# Altium PCB PCB1.PcbDoc (part 1 of 2)
Units mm, origin at the board's own origin, x right, y up, seen from the top; angles counter-clockwise.
Board outline 135 x 104.39 mm, 2 copper layers (Top Layer, Bottom Layer); 68 components, 47 nets, 230 pads, 90 vias.
Unrouted connection lines stored in the file: 3.
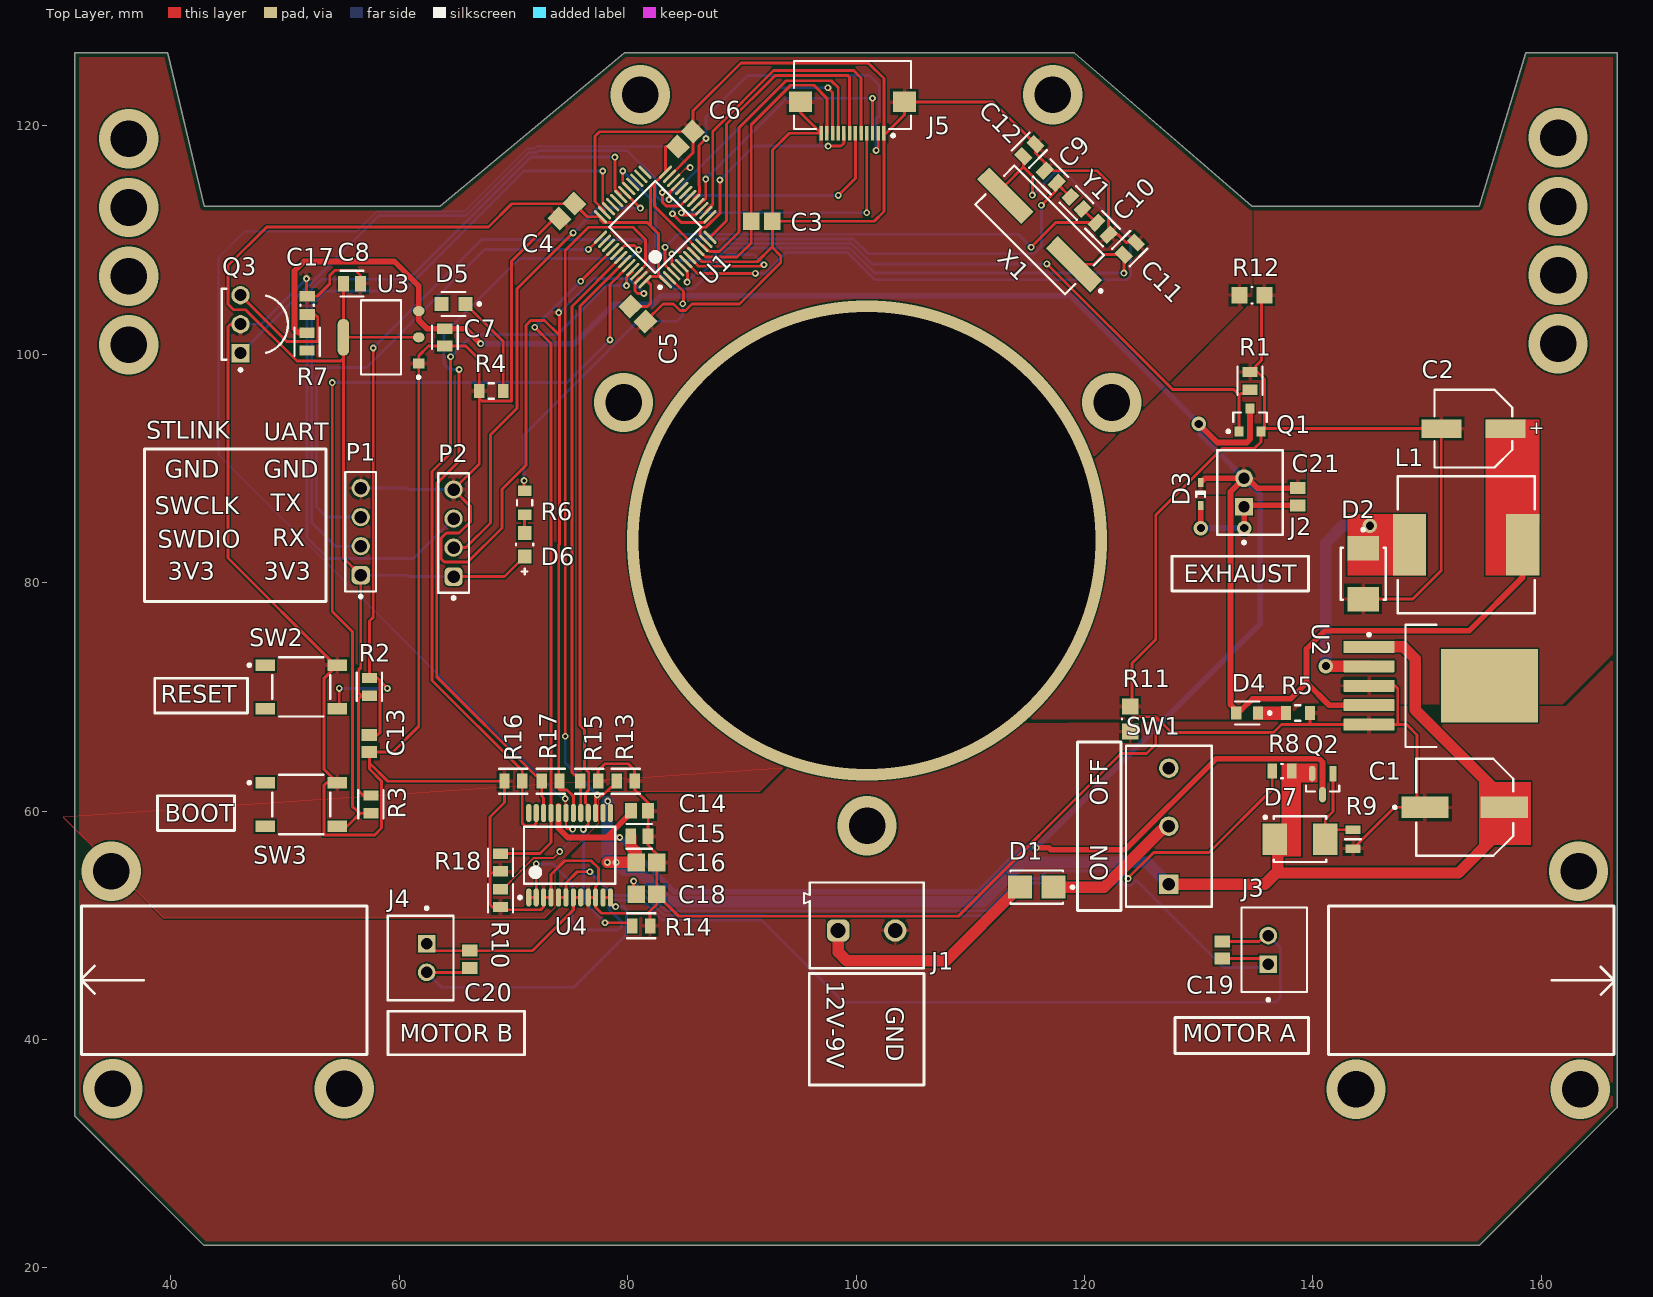
[diagram p0: Top Layer view]
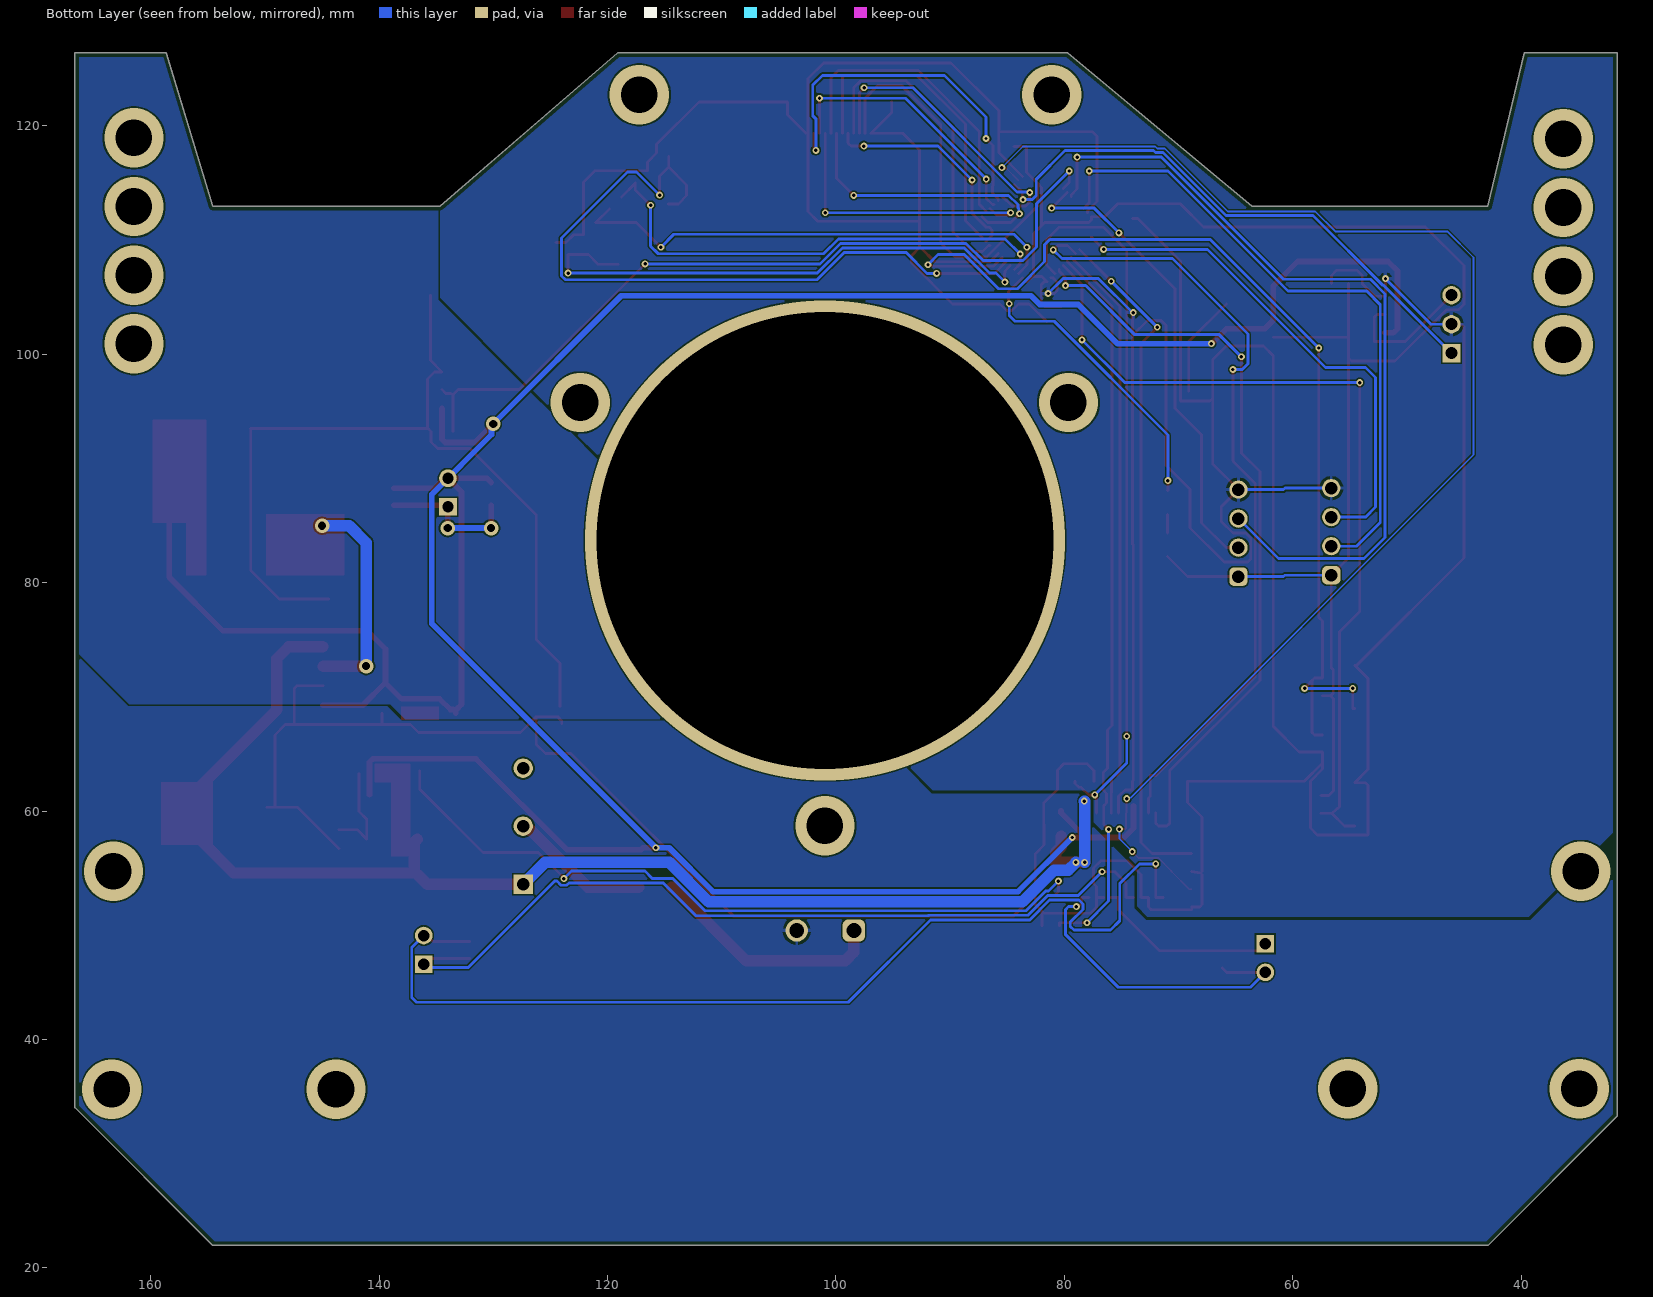
[diagram p1: Bottom Layer view, seen from below]
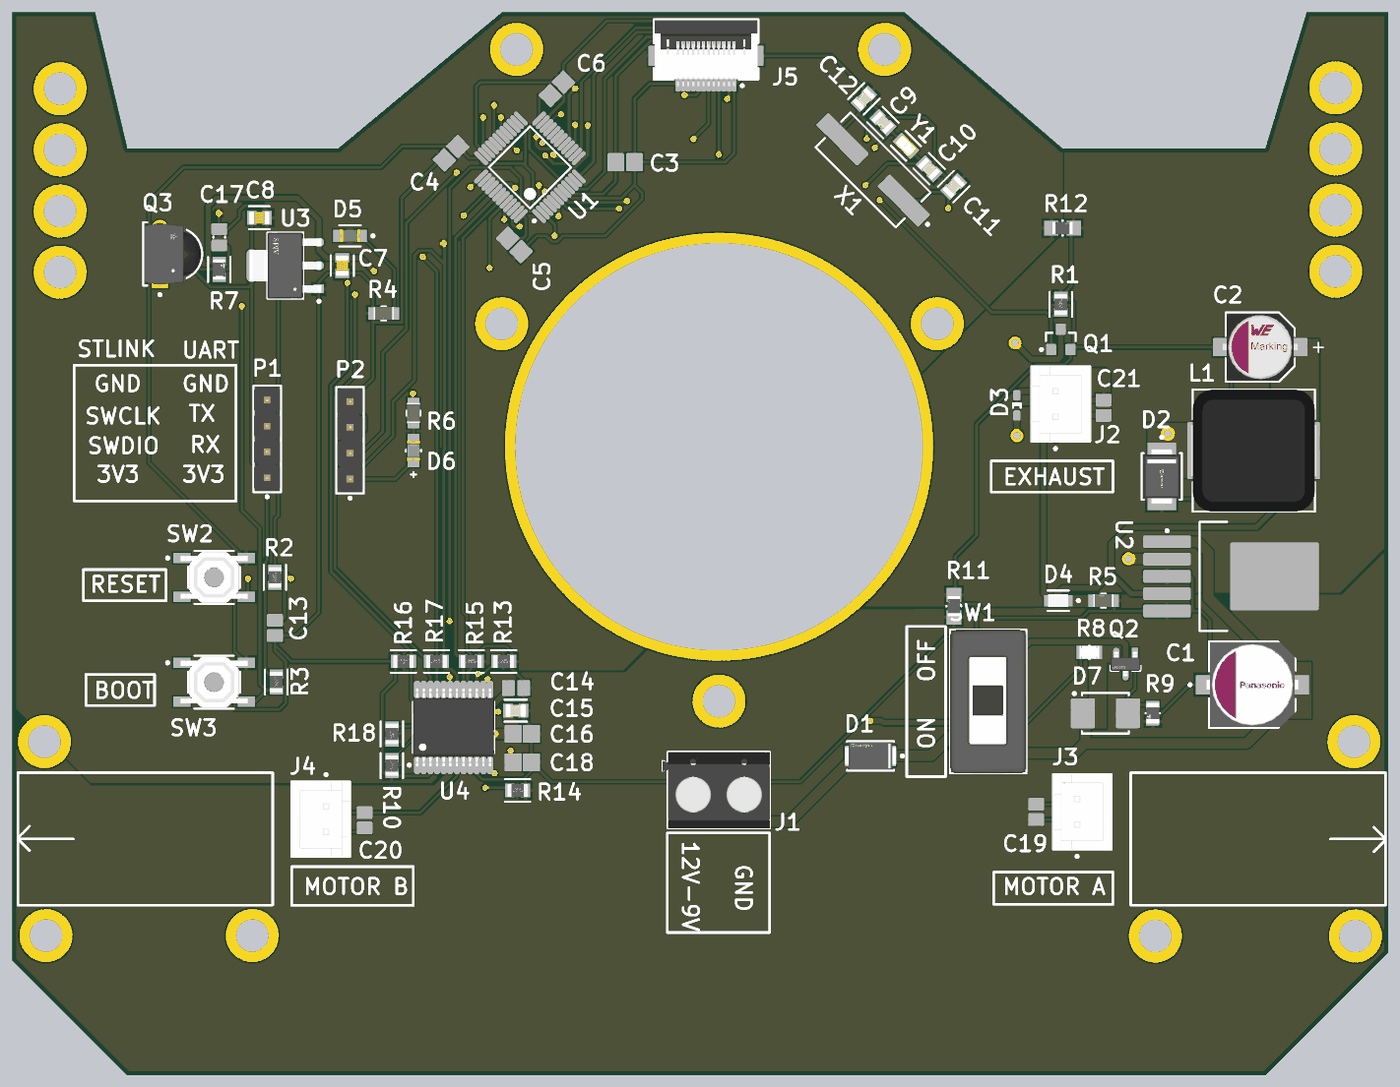
[diagram p3: 3D render of the assembled board from above, using the file's embedded part models]

## Layer stack, top to bottom
Top Solder: solder mask 0.0102, Solder Resist, Dk 3.5
Top Layer: signal copper 0.0356
Dielectric 1: dielectric 0.32, FR-4, Dk 4.8
Bottom Layer: signal copper 0.0356
Bottom Solder: solder mask 0.0102, Solder Resist, Dk 3.5

## Board outline
63.585,112.945 42.926,112.945 39.751,126.365 31.623,126.365 31.623,33.274 42.926,21.971 154.559,21.971 166.624,34.036 166.624,126.365 158.623,126.365 154.559,112.945 134.675,112.945 119.126,126.365 79.713,126.365

## Design rules (kind name [scope] priority, off if disabled: settings)
AssemblyTestPointUsage [All] p1: isadvanced=TRUE
AssemblyTestpoint [All] p1: isadvanced=TRUE testpointundercomponent=TRUE minsize=1.016 maxsize=2.54 preferedsize=1.524 minholesize=0 maxholesize=1.016 preferedholesize=0.813 testpointgrid=0.025 usegrid=TRUE gridtolerance=0 allowsidetop=TRUE allowsidebottom=TRUE
BoardOutlineClearance BoardOutlineClearance_1 [All] p1: isadvanced=TRUE gap=0.38 ignorepadtopadclearanceinfootprint=FALSE
Clearance Clearance_1 [OnMid vs OnMid] p1: gap=0.15 ignorepadtopadclearanceinfootprint=FALSE sourcerule=47 cellrowname=All cellrowtype=0 cellcolname=All cellcoltype=0 innerlayers=TRUE
Clearance Clearance_2 [(ExistsOnLayer('Top Layer') Or ExistsOnLayer('Bottom Layer')) vs (ExistsOnLayer('Top Layer') Or ExistsOnLayer('Bottom Layer'))] p2: gap=0.15 ignorepadtopadclearanceinfootprint=FALSE sourcerule=47 cellrowname=All cellrowtype=0 cellcolname=All cellcoltype=0 outerlayers=TRUE
Clearance [All] p3: gap=0.254 ignorepadtopadclearanceinfootprint=FALSE ismatrix=TRUE
ComponentClearance [All] p1: isadvanced=TRUE gap=0.254 collisioncheckmode=3 verticalgap=0.254 showdistances=FALSE
DiffPairsRouting [All] p1: maxlimit=1 minlimit=1 mostfreqgap=1 toplayer_minwidth=0.381 toplayer_maxwidth=0.381 toplayer_prefwidth=0.381 bottomlayer_minwidth=0.381 bottomlayer_maxwidth=0.381 bottomlayer_prefwidth=0.381 maxuncoupledlength=12.7
FabricationTestPointUsage [All] p1: isadvanced=TRUE valid=0 allowmultiple=FALSE
FabricationTestpoint [All] p1: isadvanced=TRUE side=3 testpointundercomponent=TRUE minsize=1.016 maxsize=2.54 preferedsize=1.524 minholesize=0 maxholesize=1.016 preferedholesize=0.813 testpointgrid=0.025 allowsidetop=TRUE allowsidebottom=TRUE usegrid=TRUE gridtolerance=0
FanoutControl Fanout_BGA [IsBGA] p1: isadvanced=TRUE bgadir=Out bgaviamode=Centered fanoutstyle=Auto fanoutdirection=Alternating viagrid=0.025 // Fanout_BGA (Default Rule)
FanoutControl Fanout_LCC [IsLCC] p2: isadvanced=TRUE bgadir=Out bgaviamode=Centered fanoutstyle=Auto fanoutdirection=Alternating viagrid=0.025 // Fanout_LCC (Default Rule)
FanoutControl Fanout_SOIC [IsSOIC] p3: isadvanced=TRUE bgadir=Out bgaviamode=Centered fanoutstyle=Auto fanoutdirection=Alternating viagrid=0.025 // Fanout_SOIC (Default Rule)
FanoutControl Fanout_Small [(CompPinCount < 5)] p4: isadvanced=TRUE bgadir=Out bgaviamode=Centered fanoutstyle=Auto fanoutdirection=OutThenIn viagrid=0.025 // Fanout_Small (Default Rule)
FanoutControl Fanout_Default [All] p5: isadvanced=TRUE bgadir=Out bgaviamode=Centered fanoutstyle=Auto fanoutdirection=Alternating viagrid=0.025 // Fanout_Default (Default Rule)
Height [All] p1: isadvanced=TRUE minheight=0 maxheight=25.4 prefheight=12.7
HoleSize [All] p1: isadvanced=TRUE absolutevalues=TRUE maxlimit=2.54 minlimit=0.025 maxpercent=80.000 minpercent=20.000
HoleToHoleClearance [All] p1: isadvanced=TRUE gap=0.254 allowstackedmicrovias=TRUE
LayerPairs [All] p1: isadvanced=TRUE enforce=TRUE
MinimumSolderMaskSliver [All] p1: isadvanced=TRUE minsoldermaskwidth=0.254
NetAntennae [All] p1: isadvanced=TRUE netantennaetolerance=0
PasteMaskExpansion [All] p1: isadvanced=TRUE expansion=0.1
PlaneClearance [All] p1: isadvanced=TRUE clearance=0.508
PlaneConnect [All] p1: isadvanced=TRUE planeconnectstyle=Relief reliefexpansion=0.508 reliefentries=4 reliefconductorwidth=0.254 reliefairgap=0.254
PolygonConnect [All] p1: connectstyle=Relief reliefconductorwidth=0.3 reliefentries=4 polygonreliefangle="90 Angle" airgapwidth=0.254
RoutingCorners [All] p1: isadvanced=TRUE cornerstyle=45-Degree minsetback=2.54 maxsetback=2.54
RoutingPriority [All] p1: isadvanced=TRUE routingpriority=0
RoutingVias [All] p1: holewidth=0.3 width=0.6 viastyle="Through Hole" minholewidth=0.3 minwidth=0.6 maxholewidth=0.5 maxwidth=1
ShortCircuit [All] p1: isadvanced=TRUE allowed=FALSE
SilkToSilkClearance [All] p1: isadvanced=TRUE silktosilkclearance=0.254
SilkToSolderMaskClearance [IsPad] p1: isadvanced=TRUE minsilkscreentomaskgap=0.15 clearancetoexposedcopper=TRUE
SolderMaskExpansion [All] p1: isadvanced=TRUE expansion=0.05 istentingtop=FALSE
SupplyNets "Schematic Supply Nets_3" [InNet('12V-9V')] p1: isadvanced=TRUE voltage=0.000
SupplyNets "Schematic Supply Nets_2" [InNet('out_fb')] p2: isadvanced=TRUE voltage=0.000
SupplyNets "Schematic Supply Nets_1" [InNet('+3V3')] p3: isadvanced=TRUE voltage=0.000
SupplyNets "Schematic Supply Nets" [InNet('GND')] p4: isadvanced=TRUE voltage=0.000
UnRoutedNet [All] p1: isadvanced=TRUE
UnpouredPolygon [All] p1: isadvanced=TRUE
Width MaxMinWidth_2 [InNet('12V-9V')] p1: maxlimit=1.25 minlimit=0.15 preferedwidth=1 minimp=50.000000 maximp=50.000000 favimp=50.000000
Width MaxMinWidth_3 [InNet('IR-INT')] p2: maxlimit=1 minlimit=0.15 preferedwidth=0.5 minimp=50.000000 maximp=50.000000 favimp=50.000000
Width MaxMinWidth_4 [InNet('STBY')] p3: maxlimit=1.25 minlimit=0.15 preferedwidth=1 minimp=50.000000 maximp=50.000000 favimp=50.000000
Width MaxMinWidth_5 [InNet('out_fb')] p4: maxlimit=1 minlimit=0.15 preferedwidth=0.5 minimp=50.000000 maximp=50.000000 favimp=50.000000
Width MaxMinWidth_6 [InNet('SW_12V-9V')] p5: maxlimit=1.25 minlimit=0.15 preferedwidth=1 minimp=50.000000 maximp=50.000000 favimp=50.000000
Width MaxMinWidth_1 [InxNetClass('All xNets')] p6: maxlimit=1 minlimit=0.15 preferedwidth=0.25 minimp=50.000000 maximp=50.000000 favimp=50.000000
Width [All] p7: maxlimit=1 minlimit=0.15 preferedwidth=0.25 minimp=50.000000 maximp=50.000000 favimp=50.000000
3 further rules are at their usual default settings.

## Components (designator, comment, footprint, x,y, rotation, side; value= is the part's Value field where it differs from the comment)
C1 "680u" FP-OS-CON-SMT-E12-MFG 153.289,60.325 r0 top
C2 "220u" WCAP-ASLI_D6.3H7.7 154.051,93.472 r0 top
C3 "100n" CAPC2013X145X50ML20T20 91.757,111.636 r180 top
C4 "100n" CAPC2013X145X50ML20T20 74.683,112.512 r45 top
C5 "100n" CAPC2013X145X50ML20T20 80.899,103.505 r135 top
C6 "100n" CAPC2013X145X50ML20T20 85.06,118.817 r225 top
C7 "10u" FP-C0805C106K8RACAUTO-MFG 64.008,101.473 r90 top
C8 "10u" FP-C0805C106K8RACAUTO-MFG 55.88,106.172 r180 top
C9 "20p" FP-C0805C-DN-MFG 117.045,115.517 r135 top value="20 pF"
C10 "20p" FP-C0805C-DN-MFG 121.581,110.981 r315 top value="20 pF"
C11 "20p" FP-C0805C-DN-MFG 123.979,109.236 r45 top value="20 pF"
C12 "20p" FP-C0805C-DN-MFG 115.177,117.845 r45 top value="20 pF"
C13 "100n" CAPC2013X140X45LL15T25 57.404,65.913 r90 top
C14 "100n" CAPC2013X140X45LL15T25 81.059,60.014 r180 top
C15 "0.1u" FP-C0805C-DN-MFG 81.026,57.785 r0 top value="0.10 μF"
C16 "0.47u" CAPC2013X140X50ML20T25 81.661,55.499 r180 top
C17 "CAP 4.7uF 10V 0805(2012)" CAPC0805(2012)155_L 51.943,104.267 r270 top value=4.7uF
C18 "10u" CAPC2013X145X50ML20T25 81.661,52.705 r180 top
C19 "100n" CAPC2013X140X45LL15T25 132.065,47.843 r90 top
C20 "100n" CAPC2013X140X45LL15T25 66.196,47.023 r270 top
C21 "100n" CAPC2013X140X45LL15T25 138.684,87.515 r270 top
D1 "1N4007 SMD" FP-1N4007_SMD-IPC_C 115.824,53.34 r180 top
D2 "0V55 5A" FP-DO-214AA-MFG 144.399,80.772 r270 top
D3 "1N4148WT" FAIR-SOD-523F-2_V 130.175,87.757 r270 top
D4 "RED" FP-SML-LXT0805IW-TR-MFG 134.239,68.58 r180 top
D5 "GREEN" FP-LTST-C171GKT-MFG 64.77,104.394 r180 top
D6 "BLUE" FP-SM0805UBWC-MFG 70.993,83.312 r90 top
D7 "6.8V" ONSC-SMB-2-403A-03_H_V 138.862,57.531 r0 top
J1 "KRE" 691502710002 100.938,49.992 r0 top
J2 "EXHAUST" FP-B2B-XH-A_LF_SN-MFG 134.493,87.884 r90 top
J3 "MOTOR-A" FP-B2B-XH-A_LF_SN-MFG 136.613,47.85 r90 top
J4 "MOTOR-B" FP-B2B-XH-A_LF_SN-MFG 61.89,47.125 r270 top
J5 "687112149022" 687112149022 99.695,122.682 r180 top
L1 "33u" SUMI-CDRH127_V 153.416,83.312 r90 top
P1 "ST-LINK" 61300411121 56.642,84.455 r90 top
P2 "UART" 61300411121 64.77,84.328 r90 top
Q1 "2N7002LT1G" ONSC-SOT-23-3-318-08_V 134.493,94.234 r90 top
Q2 "DMP3099L-7" FP-SOT23-IPC_B 140.843,62.357 r270 top
Q3 "TSOP34836" FP-6_550-5169_01-4-MFG 47.371,102.616 r0 top
R1 "10k" FP-CRGCQ0805-IPC_C 134.493,97.663 r90 top value=10KΩ
R2 "10k" FP-CRGCQ0805-IPC_C 57.404,70.866 r90 top value=10KΩ
R3 "10k" FP-CRGCQ0805-IPC_C 57.531,60.579 r270 top value=10KΩ
R4 "220R" FP-AC0805-MFG 68.072,96.774 r0 top value=220Ω
R5 "220R" FP-AC0805-MFG 138.684,68.58 r180 top value=220Ω
R6 "220R" FP-AC0805-MFG 70.993,86.995 r270 top value=220Ω
R7 "100R" FP-CRCW0805-HPe3-IPC_C 51.943,101.092 r270 top
R8 "1R" FP-CRCW0805-e3-IPC_C 137.287,63.5 r180 top
R9 "100k" FP-MCU0805-IPC_C 143.51,57.531 r270 top
R10 "10k" FP-CRGCQ0805-IPC_C 68.876,52.38 r270 top value=10KΩ
R11 "JUMPER" FP-HCJ0805-MFG 124.005,68.043 r90 top
R12 "JUMPER" FP-HCJ0805-MFG 134.663,105.156 r0 top
R13 "10k" FP-CRGCQ0805-IPC_C 79.843,62.613 r0 top value=10KΩ
R14 "10k" FP-CRGCQ0805-IPC_C 81.202,49.951 r0 top value=10KΩ
R15 "10k" FP-CRGCQ0805-IPC_C 76.65,62.613 r0 top value=10KΩ
R16 "10k" FP-CRGCQ0805-IPC_C 70.009,62.613 r180 top value=10KΩ
R17 "10k" FP-CRGCQ0805-IPC_C 73.261,62.613 r0 top value=10KΩ
R18 "10k" FP-CRGCQ0805-IPC_C 68.876,55.496 r270 top value=10KΩ
SW1 "25436NAH6" FP-25436NAH6-MFG 127.381,58.674 r90 top
SW2 "8-1437565-1" FP-8-1437565-1-MFG 51.435,70.866 r0 top
SW3 "8-1437565-1" FP-8-1437565-1-MFG 51.435,60.579 r0 top
U1 "STM32F103C8T6" STM-LQFP48_L 82.423,111.125 r135 top
U2 "LM2596S-5.0/NOPB" KTT0005B_M 151.207,70.964 r0 top
U3 "AMS1117-3.3" FP-AMS1117-IPC_C 58.42,101.473 r180 top
U4 "TB6612FNG" TOSH-SSOP-24_M 74.93,56.134 r90 top
X1 "16MHz" CTS-ATS-SM-XTAL-2 116.078,110.871 r135 top
Y1 "32.768k" FP-NX2012SA-MFG 119.297,113.237 r135 top
? "Comment" "micro gear motor n20" 166.353,51.686 r180 top
? "Comment" "micro gear motor n20" 32.186,38.686 r0 top

## Footprints (in the part's own frame and the unit in brackets; to place one, negate y for a bottom-side part, rotate by r counter-clockwise, add the part's x,y. Pads: shape width x height; smd on the part's side, far side on the other; paste and mask are expansions set on the pad)
61300411121 [mm] "Pin Header, pitch 2.54 mm, THT, Vertical, single row, 4p"
  rrect50% 1.6x1.6 hole 1.1: 1(-3.81,0)
  round 1.6 hole 1.1: 2(-1.27,0) 3(1.27,0) 4(3.81,0)
  silkscreen extent -5.8,-1.34 5.23,1.34, body extent -5.08,-1.27 5.08,1.27, height 8.57
687112149022 [mm] "0.50mm SMT ZIF Horizontal Hinge Type Bottom Contact, 12p"
  rect 0.3x1.3 smd: 1(-2.75,3.35) 2(-2.25,3.35) 3(-1.75,3.35) 4(-1.25,3.35) 5(-0.75,3.35) 6(-0.25,3.35) 7(0.25,3.35) 8(0.75,3.35) 9(1.25,3.35) 10(1.75,3.35) 11(2.25,3.35) 12(2.75,3.35)
  rect 2x1.8 smd: M1(-4.55,0.6) M2(4.55,0.6)
  silkscreen extent -5.13,-2.98 5.13,3.67, body extent -5.05,-2.9 5.05,3.6, height 2.25
691502710002 [mm] "5,00mm - modular - Reflow compatible - Horizontal entry with pressure clamp - 02p"
  rrect50% 1.95x1.95 hole 1.3: 1(-2.5,-0.45)
  round 1.95 hole 1.3: 2(2.5,-0.45)
  silkscreen extent -5.5,-3.75 5,3.75, body extent -5.5,-3.75 5,3.75, height 10.1
CAPC0805(2012)155_L [mm] "Chip Capacitor, Body 2.0x1.2mm, Height 1.55mm, IPC High Density"
  rect 0.95x1.35 smd: 1(-0.8,0) 2(0.8,0)
  silkscreen extent -0.05,-0.58 0.05,0.58, body extent -1.1,-0.72 1.1,0.72, height 1.55
CAPC2013X140X45LL15T25 [mm] "Chip Capacitor, 2-Leads, Body 2.00x1.25mm, IPC High Density"
  rect 1.05x1.35 smd: 1(-0.75,0) 2(0.75,0)
  body extent -1.08,-0.7 1.07,0.7, height 1.4
CAPC2013X140X50ML20T25 [mm] "Chip Capacitor, 2-Leads, Body 2.00x1.25mm, IPC Low Density"
  rect 1.5x1.55 smd: 1(-0.9,0) 2(0.9,0)
  body extent -1.1,-0.72 1.1,0.72, height 1.4
CAPC2013X145X50ML20T20 [mm] "Chip Capacitor, 2-Leads, Body 2.00x1.25mm, IPC Low Density"
  rect 1.45x1.55 smd: 1(-0.925,0) 2(0.925,0)
  body extent -1.1,-0.72 1.1,0.72, height 1.45
CAPC2013X145X50ML20T25 [mm] "Chip Capacitor, 2-Leads, Body 2.00x1.25mm, IPC Low Density"
  rect 1.5x1.55 smd: 1(-0.9,0) 2(0.9,0)
  body extent -1.1,-0.72 1.1,0.72, height 1.45
CTS-ATS-SM-XTAL-2 [mm] "SMD, 2-Leads, Body 11.1x4.83mm, Pitch 8.5mm"
  rect 5.5x1.5 smd: 1(-4.25,0) 2(4.25,0)
  silkscreen extent -7.67,-2.42 5.55,2.42, body extent -5.59,-2.42 5.59,2.42, height 4.3
FAIR-SOD-523F-2_V [mm] "SMD, 2-Leads, Body 1.2x0.8mm, Height 0.7mm"
  rect 0.8x0.5 smd: 1(-1,0) 2(1,0)
  silkscreen extent -0.2,-0.38 0.24,0.38, body extent -0.6,-0.4 0.6,0.4, height 0.71
FP-1N4007_SMD-IPC_C [mm]
  rect 2.1x2 smd paste+0 mask+0: 1(-1.45,0) 2(1.45,0)
  silkscreen extent -3.25,-1.45 2.3,1.45, body extent -2.6,-1.55 2.6,1.55, height 0.25
FP-6_550-5169_01-4-MFG [mm]
  rect 1.6x1.6 hole 1.05 paste-2539.97 mask+0: 1(-1.25,-2.54)
  round 1.6 hole 1.05 paste-2539.97 mask+0: 2(-1.25,0) 3(-1.25,2.54)
  silkscreen extent -2.9,-4.12 2.9,3.1, body extent -3,-3.44 3,3.44, height 0.25
FP-8-1437565-1-MFG [mm]
  rect 1.7x1 smd paste+0 mask+0: 1(-3.15,1.9) 2(3.15,1.9) 3(-3.15,-1.9) 4(3.15,-1.9)
  silkscreen extent -4.67,-2.6 2.55,2.6, body extent -4.1,-2.7 4.1,2.7, height 0.25
FP-25436NAH6-MFG [mm]
  rect 1.7x1.7 hole 1.1 paste-2539.97 mask+0: 1(-5.08,0)
  round 1.7 hole 1.1 paste-2539.97 mask+0: 2(0,0) 3(5.08,0)
  silkscreen extent -7.05,-3.75 7.05,3.75, body extent -7.15,-3.85 7.15,3.85, height 0.25
FP-AC0805-MFG [mm]
  rect 0.9x1.2 smd paste+0 mask+0: 1(-1.05,0) 2(1.05,0)
  silkscreen extent -0.22,-0.67 0.22,0.67, body extent -1.6,-0.77 1.6,0.77, height 0.25
FP-AMS1117-IPC_C [mm]
  rect 1.004x0.872 smd paste+0 mask+0: 1(-3.295,2.29)
  rrect100% 1.004x0.872 smd paste+0 mask+0: 2(-3.295,0) 3(-3.295,-2.29)
  rrect87% 1.004x3.182 smd paste+0 mask+0: 4(3.295,0)
  silkscreen extent -3.42,-3.25 1.75,3.62, body extent -3.9,-3.35 3.9,3.35, height 0.25
FP-B2B-XH-A_LF_SN-MFG [mm]
  rect 1.55x1.55 hole 1 paste-2539.97 mask+0: 1(-1.25,0.525)
  round 1.55 hole 1 paste-2539.97 mask+0: 2(1.25,0.525)
  silkscreen extent -4.5,-2.88 3.7,2.88, body extent -3.8,-2.98 3.8,2.98, height 0.25
FP-C0805C106K8RACAUTO-MFG [mm]
  rect 0.95x1.35 smd paste+0 mask+0: 1(-0.75,0) 2(0.75,0)
  silkscreen extent -1,-1.13 1,1.13, body extent -1.4,-0.85 1.4,0.85, height 0.25
FP-C0805C-DN-MFG [mm]
  rect 0.95x1.35 smd paste+0 mask+0: 1(-0.75,0) 2(0.75,0)
  silkscreen extent -1.1,-1.07 1.1,1.08, body extent -1.4,-0.85 1.4,0.85, height 0.25
FP-CRCW0805-e3-IPC_C [mm]
  rect 0.807x1.308 smd paste+0 mask+0: 1(-0.851,0) 2(0.851,0)
  silkscreen extent -0.07,-0.62 0.07,0.62, body extent -1.35,-0.8 1.35,0.8, height 0.25
FP-CRCW0805-HPe3-IPC_C [mm]
  rect 0.906x1.308 smd paste+0 mask+0: 1(-0.776,0) 2(0.776,0)
  silkscreen extent -1.23,-1.1 1.23,1.1, body extent -1.33,-0.8 1.33,0.8, height 0.25
FP-CRGCQ0805-IPC_C [mm]
  rect 0.906x1.31 smd paste+0 mask+0: 1(-0.776,0) 2(0.776,0)
  silkscreen extent -1.23,-1.1 1.23,1.1, body extent -1.33,-0.8 1.33,0.8, height 0.25
FP-DO-214AA-MFG [mm]
  rect 2.16x2.79 smd paste+0 mask+0: 1(-2.22,0) 2(2.22,0)
  silkscreen extent -3.97,-1.97 2.28,1.97, body extent -3.4,-2.07 3.4,2.07, height 0.25
FP-HCJ0805-MFG [mm]
  rect 1.4x1.44 smd paste+0 mask+0: 1(-1.1,0) 2(1.1,0)
  silkscreen extent -0.02,-0.73 0.02,0.73, body extent -1.9,-0.82 1.9,0.82, height 0.25
FP-LTST-C171GKT-MFG [mm]
  rect 1.2x1.2 smd paste+0 mask+0: 1(-1.05,0) 2(1.05,0)
  silkscreen extent -2.38,-1.05 1.05,1.05, body extent -1.75,-0.77 1.75,0.77, height 0.25
FP-MCU0805-IPC_C [mm]
  rect 0.759x1.308 smd paste+0 mask+0: 1(-0.827,0) 2(0.827,0)
  silkscreen extent 0,-0.7 0,0.7, body extent -1.31,-0.8 1.31,0.8, height 0.25
FP-NX2012SA-MFG [mm]
  rect 1x1.25 smd paste+0 mask+0: 1(-0.75,0) 2(0.75,0)
  silkscreen extent -1.05,-1.03 1.05,1.02, body extent -1.35,-0.72 1.35,0.72, height 0.25
FP-OS-CON-SMT-E12-MFG [mm]
  rect 4.15x1.9 smd paste+0 mask+0: 1(-3.475,0) 2(3.475,0)
  silkscreen extent -6.25,-4.25 4.25,4.25, body extent -5.8,-4.5 5.8,4.5, height 0.25
FP-SM0805UBWC-MFG [mil]
  rect 47x47 smd paste+0 mask+0: 1(-40.5,0) 2(40.5,0)
  silkscreen extent -102,-30 3,30, body extent -68,-33 68,33, height 10
FP-SML-LXT0805IW-TR-MFG [mm]
  rect 0.9x1.1 smd paste+0 mask+0: 1(-0.95,0) 2(0.95,0)
  silkscreen extent -2.1,-1 1.05,1, body extent -1.5,-0.8 1.5,0.8, height 0.25
FP-SOT23-IPC_B [mm]
  rect 1.359x0.587 smd paste+0 mask+0: 1(-0.927,0.915)
  rrect100% 1.359x0.587 smd paste+0 mask+0: 2(-0.927,-0.915) 3(0.927,0)
  silkscreen extent 0.13,-1.45 0.65,1.45, body extent -1.86,-1.7 1.86,1.7, height 0.25
KTT0005B_M [mm] "DPAK, 5-Leads, Body 10.65x9.65mm, Pitch 1.7mm, IPC Low Density"
  rrect10% 4.45x1.05 smd: 1(-6.3,3.4) 2(-6.3,1.7) 3(-6.3,0) 4(-6.3,-1.7) 5(-6.3,-3.4)
  rrect2% 8.5x6.45 smd: 6(4.25,0)
  silkscreen extent -6.42,-5.35 -0.4,5.35, body extent -3.1,-5.32 6.55,5.33, height 4.83
"micro gear motor n20" [mm]
  silkscreen extent 0,0 25,13
ONSC-SMB-2-403A-03_H_V [mm] "Molded, 2-Leads, Body 4.6x3.95mm"
  rect 2.159x2.743 smd: 1(-2.21,0) 2(2.21,0)
  silkscreen extent -3.16,-2 2.3,2.05, body extent -2.3,-1.97 2.3,1.97, height 2.42
ONSC-SOT-23-3-318-08_V [mm] "SOT23, 3-Leads, Body 2.92x1.3mm, Pitch 0.95mm"
  rect 0.9x0.8 smd: 1(-1,0.95) 2(-1,-0.95) 3(1,0)
  silkscreen extent -1.12,-1.46 0.65,2.02, body extent -0.65,-1.46 0.65,1.46, height 1.11
STM-LQFP48_L [mm] "QFP, 48-Leads, Body 7x7mm, Pitch 0.5mm, IPC High Density"
  oval 1.55x0.25 smd: 1(-4.025,2.75) 2(-4.025,2.25) 3(-4.025,1.75) 4(-4.025,1.25) 5(-4.025,0.75) 6(-4.025,0.25) 7(-4.025,-0.25) 8(-4.025,-0.75) 9(-4.025,-1.25) 10(-4.025,-1.75) 11(-4.025,-2.25) 12(-4.025,-2.75) 25(4.025,-2.75) 26(4.025,-2.25) 27(4.025,-1.75) 28(4.025,-1.25) 29(4.025,-0.75) 30(4.025,-0.25) 31(4.025,0.25) 32(4.025,0.75) 33(4.025,1.25) 34(4.025,1.75) 35(4.025,2.25) 36(4.025,2.75)
  oval 0.25x1.55 smd: 13(-2.75,-4.025) 14(-2.25,-4.025) 15(-1.75,-4.025) 16(-1.25,-4.025) 17(-0.75,-4.025) 18(-0.25,-4.025) 19(0.25,-4.025) 20(0.75,-4.025) 21(1.25,-4.025) 22(1.75,-4.025) 23(2.25,-4.025) 24(2.75,-4.025) 37(2.75,4.025) 38(2.25,4.025) 39(1.75,4.025) 40(1.25,4.025) 41(0.75,4.025) 42(0.25,4.025) 43(-0.25,4.025) 44(-0.75,4.025) 45(-1.25,4.025) 46(-1.75,4.025) 47(-2.25,4.025) 48(-2.75,4.025)
  silkscreen extent -4.15,-2.85 2.85,3.55, body extent -3.5,-3.5 3.5,3.5, height 1.6
SUMI-CDRH127_V [mm] "SMD, 2-Leads, Body 12x12mm"
  rect 5.4x2.9 smd: 1(0,4.95) 2(0,-4.95)
  silkscreen extent -6,-6 6,6, body extent -6,-6.1 6,6.1, height 8.4
TOSH-SSOP-24_M [mm] "SOP, 24-Leads, Body 8x5.8mm, Pitch 0.65mm, IPC Low Density"
  oval 1.6x0.45 smd: 1(-3.7,3.575) 2(-3.7,2.925) 3(-3.7,2.275) 4(-3.7,1.625) 5(-3.7,0.975) 6(-3.7,0.325) 7(-3.7,-0.325) 8(-3.7,-0.975) 9(-3.7,-1.625) 10(-3.7,-2.275) 11(-3.7,-2.925) 12(-3.7,-3.575) 13(3.7,-3.575) 14(3.7,-2.925) 15(3.7,-2.275) 16(3.7,-1.625) 17(3.7,-0.975) 18(3.7,-0.325) 19(3.7,0.325) 20(3.7,0.975) 21(3.7,1.625) 22(3.7,2.275) 23(3.7,2.925) 24(3.7,3.575)
  silkscreen extent -3.82,-4 2.5,4.47, body extent -3.8,-4 3.8,4, height 1.6
WCAP-ASLI_D6.3H7.7 [mm] "Aluminium Electrolytic V-Chip SMT Capacitors, 6.3x7.7mm"
  rect 3.5x1.6 smd: 1(2.8,0) 2(-2.8,0)
  silkscreen extent -3.4,-3.4 3.4,3.4, body extent -3.65,-3.3 3.65,3.3, height 7.7

## Part data
C1: library part CMP-05428-001321-1, "Conductive Polymer Aluminum Solid Capacitors (OS-CON) 680uF ±20% 16V", Capacitance=680uF, Case/Package=Radial, ESR (Equivalent Series Resistance)=14mR, Max Operating Temperature=125°C, Min Operating Temperature=-55°C, Tolerance=20%, Voltage Rating=16V, Life (Hours)=1000Hour, Mount="Surface Mount", Packaging="Tape and Reel"
C2: library part CMP-03913-53914576-2, "WCAP-ASLI Aluminum Electrolytic Capacitors", Capacitance=220µF, Case/Package=Radial, ESR (Equivalent Series Resistance)=363.323mΩ, Insulation Resistance=454.545kΩ, Leakage Current=35.2µA, Max Operating Temperature=105°C, Min Operating Temperature=-55°C, Ripple Current=275mA, Voltage Rating=16V, Diameter=6.3mm, Height=7.7mm, Impedance=430mΩ, Length=7.7mm, Life (Hours)=2000hours, Packaging="Cut Tape", REACH SVHC=Unknown, Ripple Current (AC)=275mA, RoHS=Compliant, Voltage Rating (DC)=16V, Width=6.6mm
C3 C4 C5 C6: library part CMP-1036-04409-2, Manufacturer=Vitramon, Part Number=VJ0805Y104JXXCW1BC
C7 C8: library part CMP-03020-034662-1, "CAP CER 10UF 10V X7R 0805", Capacitance=10uF, Case Code (Imperial)=0805, Case Code (Metric)=2012, Max Operating Temperature=125°C, Min Operating Temperature=-55°C, Ratings=AEC-Q200, Tolerance=10%, Voltage Rating=10V, Case/Package=0805, Mount="Surface Mount", Packaging="Tape and Reel", RoHS Compliant=Yes
C9 C10 C11 C12: library part CMP-03020-007860-1, "C0805 20 pF X8R 30ppm/°C 2.00% 10 V", Capacitance="20 pF", Manufacturer=KEMET, Manufacturer Part Number=C0805C200G8HACTU, Package=C0805C-DN, Temperature="-55°C to +125°C", Temperature Characteristic=X8R, Temperature Coefficient=30ppm/°C, Temperature Range High=+125°C, Temperature Range Low=-55°C, Tolerance=0.02, Voltage Rating="10 V", Automotive=No, Category=Cap, ComponentLink2Description=Datasheet, ComponentLink2URL=https://content.kemet.com/datasheets/KEM_C1003_C0G_SMD.pdf, Device Class L1="Passive Components", Device Class L2=Capacitors, Device Class L3="Ceramic Capacitors", Height=0.88mm, Ipc Land Pattern Name=CAPC200125X78, Lead Free=Yes, Material=Ceramic, Octopart=https://octopart.com/c0805c200g8hactu-kemet-88726762, RoHS=TRUE
C13 C14 C19 C20 C21: library part CMP-2007-03344-1, Manufacturer=Murata, Part Number=GCM21BR71E104KA37L
C15: library part CMP-2007-00279-2, "CAP CER 0.1UF 50V X7R 0805", Capacitance="0.10 μF", Manufacturer=KEMET, Manufacturer Part Number=C0805C104K5RACTU, Package=C0805C-DN, Temperature="-55°C to +125°C", Temperature Characteristic=X7R, Temperature Coefficient=30ppm/°C, Temperature Range High=+125°C, Temperature Range Low=-55°C, Tolerance=0.1, Voltage Rating="50 V", Automotive=No, Category=Cap, ComponentLink2Description=Datasheet, ComponentLink2URL=https://content.kemet.com/datasheets/KEM_C1003_C0G_SMD.pdf, Device Class L1="Passive Components", Device Class L2=Capacitors, Device Class L3="Ceramic Capacitors", Digikey Description="CAP CER 0.1UF 50V X7R 0805", Height=0.88mm, Ipc Land Pattern Name=CAPC200125X78, Lead Free=Yes, Material=Ceramic, Mouser Description="Cap Ceramic 0.1uF 50V X7R 10% SMD 2.0 x 1.2 mm 125 C Paper T/R", Octopart=https://octopart.com/c0805c104k5ractu-kemet-143926, RoHS=TRUE
C16: library part CMP-2007-03294-1, Manufacturer=Kemet, Part Number=C0805C474K3NACTU
C17: library part CMP-1036-04882-1, "CAP 4.7uF 10V ±10% 0805 (2012 Metric) Thickness 1.55mm SMD", Case-EIA=0805, Case-Metric=2012, Rated Voltage="10 V", Tolerance=Â±10%, Max Thickness="1.55 mm", Technology=SMT
C18: library part CMP-2007-01018-1, Manufacturer=Kemet, Part Number=C0805C106M4PACTU
D1: library part CMP-12389-000001-1, "Rectifier, 1Kv, 1A, Do-214Ac Rohs Compliant: Yes"
D2: library part CMP-00252-99177889-1, "5819SMJE3/TR13 Rectifier Diode, Schottky, 1 Phase, 1 Element, 1A, 40V V(RRM), Silicon", Average Rectified Current=1A, Capacitance=50pF, Case/Package=SMB, Forward Voltage=850mV, Max Forward Surge Current (Ifsm)=50A, Max Junction Temperature (Tj)=150°C, Max Repetitive Reverse Voltage (Vrrm)=40V, Min Operating Temperature=-55°C, Peak Reverse Current=1mA, Element Configuration=Single, Forward Current=1A, Height=2.41mm, Lead Free="Lead Free", Lifecycle Status=Production, Max Operating Temperature=150°C, Max Reverse Voltage (DC)=40V, Mount="Surface Mount", NexarPartId=99177889, Number of Pins=2, Packaging="Tape & Reel (TR)", Peak Non-Repetitive Surge Current=50A, Radiation Hardening=No, Reverse Voltage=40V, Reverse Voltage (DC)=40V, RoHS=Compliant, Schedule B=8541100080
D3: library part CMP-0881-00001-1, "High Conductance Fast Switching Diode, 75 V, -55 to 150 degC, 2-Pin SOD523F, RoHS", Manufacturer="Fairchild Semiconductor", Temperature Range="-55 to 150 degC", BVR (IR="5 uA)=75 V Min.", CO="4 pF Max.", ComponentLink1Description="Manufacturer URL", ComponentLink1URL=http://www.fairchildsemi.com/, ComponentLink2Description=Datasheet, ComponentLink2URL=http://www.fairchildsemi.com/ds/1N/1N4148WT.pdf, DatasheetVersion="Rev. A2", IR (VR="75 V)=5 uA Max.", Mounting Technology="Surface Mount", PackageDescription="2-Pin Surface Mount Device, Body 1.2 x 0.8 mm, Height 0.7 mm", PackageReference=SOD-523F-2, PartNumber=1N4148WT, RoHS=TRUE, VF="1 V Max."
D4: library part CMP-1724-00002-2, "LED RED DIFFUSED SMD", Case Code (Imperial)=0805, Case Code (Metric)=2012, Color=Red, Forward Current=20mA, Forward Voltage=2V, Lens Color=White, Max Operating Temperature=80°C, Min Operating Temperature=-25°C, Package Quantity=1, Approvals=UL, Case/Package=0805, Dominant Wavelength=635nm, Height=0.8mm, Illumination Color=Red, Lead Free="Lead Free", Length=2mm, Lens Style=Rectangular, Lens Transparency=Diffused, Luminous Intensity=11mcd, Mount="Surface Mount", Number of LEDs=1, Number of Pins=2, Packaging="Tape and Reel", REACH SVHC="No SVHC", Test Current=20mA, Viewing Angle=140°, Wavelength=635nm, Width=1.25mm
D5: library part CMP-22017-000007-1, "LED GREEN CLEAR CHIP SMD", Case Code (Imperial)=0805, Case Code (Metric)=2012, Color=Green, Forward Current=30mA, Forward Voltage=2.1V, Lens Color=Colorless, Max Operating Temperature=85°C, Min Operating Temperature=-55°C, Package Quantity=1, Power Dissipation=100mW, Reverse Voltage=5V, Test Current=10mA, Case/Package=0805, Depth=1.25mm, Dominant Wavelength=569nm, Height=0.8mm, Illumination Color=Green, Lead Free="Lead Free", Length=2mm, Lens Style=Diffused, Lens Transparency=Clear, Luminous Intensity=12mcd, Mount="Surface Mount", Number of Elements=1, Number of LEDs=1, Number of Pins=2, Packaging="Tape and Reel", Power Rating=100mW, Radiation Hardening=No, Viewing Angle=130°, Wavelength=585nm, Width=1.25mm
D6: library part CMP-35283-000004-1, "LED BLUE CLEAR 0805 SMD", Case Code (Imperial)=0805, Case Code (Metric)=2012, Color=Blue, Forward Current=20mA, Forward Voltage=3.3V, Lens Color=Colorless, Max Operating Temperature=80°C, Min Operating Temperature=-30°C, Package Quantity=3000, Power Rating=100mW, Case/Package=0805, Dominant Wavelength=470nm, Height=1.1mm, Illumination Color=Blue, Lead Free="Lead Free", Length=2mm, Lens Style=Rectangular, Lens Transparency=Clear, Luminous Intensity=115mcd, Mount="Surface Mount", Number of Pins=2, Packaging="Tape and Reel", Test Current=20mA, Viewing Angle=130°, Wavelength=470nm, Width=1.2mm
D7: library part CMP-1060-00231-1, "3 W Zener Voltage Regulator, 2-Pin SMB, Pb-Free, Tape and Reel", Manufacturer="On Semiconductor", PartNumber=1SMB5921BT3G, ComponentLink1Description="Manufacturer URL", ComponentLink1URL=http://www.onsemi.com/, ComponentLink2Description=Datasheet, ComponentLink2URL=http://www.onsemi.com/pub_link/Collateral/1SMB5913BT3-D.PDF, ComponentLink3Description="Package Specification", ComponentLink3URL=http://www.onsemi.com/pub_link/Collateral/1SMB5913BT3-D.PDF, DatasheetVersion="Rev. 8", Mounting Technology="Surface Mount", PackageDescription="2-Pin Small Molded Package, J-Bend Lead, Body 4.33 x 3.625 mm", PackageReference=SMB-2-403A-03_H, PackageVersion="Rev. H, 05/2011", Packing="Tape and Reel", RoHS=Pb-Free, VZ Typ (V)=6.8
J1: library part CMP-1502-03333-3, "Terminal Block, Wtb, 2Way, 22-14Awg Rohs Compliant: Yes", Max Operating Temperature=130°C, Min Operating Temperature=-45°C, Length=10mm, Number of Pins=2, Packaging=Box, Pitch=5mm
J2 J3 J4: library part CMP-2000-05888-3, "CONN HEADER VERT 2POS 2.5MM", Color=Natural, Contact Resistance=20mR, Current Rating=3A, Housing Color=White, Insulation Resistance=1GR, Max Operating Temperature=85°C, Max Voltage Rating (AC)=250V, Min Operating Temperature=-25°C, Connector Type="Male Pin", Contact Material=Brass, Contact Plating=Tin, Contact Type="Male Pin", Depth=5.75mm, Fastening Type=Detent, Housing Material=Polyamide, Lead Free="Lead Free", Lead Pitch=2.5mm, Length=7.4mm, Max Current Rating=3A, Max Voltage Rating (DC)=250V, Mount="Through Hole", Number of Contacts=2, Number of Positions=2, Number of Rows=1, Orientation=Straight, Packaging=Bulk, Pitch=2.5mm, REACH SVHC="No SVHC", Series=XH, Termination=Solder, Voltage Rating=250V, Voltage Rating (AC)=250V, Wire/Cable Gauge=22AWG
J5: library part CMP-1502-01626-3, "FFC/FPC Connector, 12 Contact(s), 1 Row(s), Female, Right Angle, Surface Mount Terminal", Contact Resistance=50mΩ, Current Rating=500mA, Flammability Rating="UL94 V-0", Insulation Resistance=500MΩ, Max Operating Temperature=105°C, Min Operating Temperature=-40°C, Operating Supply Voltage=50V, Actuator Material="Nylon, Polyamide", Contact Material=Bronze, Contact Plating=Tin, Gender=Receptacle, Lead Pitch=500µm, Length=6.6mm, Mount="Surface Mount", Number of Contacts=12, Number of Pins=12, Number of Positions=12, Number of Rows=1, Orientation=Horizontal, Packaging="Tape and Reel", Pitch=500µm, REACH SVHC=Unknown, RoHS=Compliant, Termination=Solder, Voltage Rating=50V, Wire/Cable Type=Straight
L1: library part CMP-2000-06084-1, "Power Inductor, 10 uH, +/- 20%, -40 to 100 degC, 2-Pin SMD, RoHS, Tape and Reel", Current - Saturation=-, Current Rating=5.4A, DC Resistance (DCR)=21.6mOhmMax, Frequency - Test=1kHz, Inductance=10µH, Manufacturer=Sumida, Operating Temperature=-40°C~100°C, Package / Case=Nonstandard, Package Description="2-Pin Surface Mount Device, Body 12 x 12 mm", Package Reference=CDRH127, Standard Package=1, Tolerance=±20%, Catalog Drawings=CDRH127SeriesFrontCDRH127SeriesSideCDRH127SeriesBottom, Category=Inductors,Coils,Chokes, Datasheet URL=http://products.sumida.com/products/pdf/CDRH127.pdf, Datasheet Version=01/2014, Family=FixedInductors, Frequency - Self Resonant=-, Height - Seated (Max)="0.315\"(8.00mm)", Manufacturer URL=http://www.sumida.com/, Material - Core=-, Mounting Technology=SurfaceMount, Mounting Type=SurfaceMount, Online Catalog=CDRHSeries, Other Names=308-1457-1, Packaging=CutTape(CT), Product Training Modules=PowerInductorBasics, Q @ Freq=-, Ratings=-, Series=CDRH127, Shielding=Shielded, Size / Dimension="0.472\"Lx0.472\"W(12.00mmx12.00mm)", Type=-
P1 P2: library part CMP-1502-01064-4, "THT Vertical Pin Header WR-PHD, Pitch 2.54 mm, Single Row, 4 pins", Color=Black, Contact Resistance=20mΩ, Current Rating=3A, Max Operating Temperature=105°C, Min Operating Temperature=-40°C, Operating Supply Voltage=250V, Connector Type="Male Pin", Contact Material=Gold, Contact Mating Length=5.9944mm, Contact Plating=Gold, Gender=Male, Height=8.89mm, Lead Free="Lead Free", Lead Pitch=2.54mm, Mount="Through Hole", Number of Contacts=4, Number of Pins=4, Number of Positions=4, Number of Rows=1, Orientation=Vertical, Packaging=Bulk, Pitch=2.54mm, RoHS=Compliant, Termination=Solder, Voltage Rating=250V
Q1: library part CMP-1058-00781-1, "Small Signal MOSFET, 60 V, 115 mA, N-Channel, 3-Pin SOT-23, Pb-Free, Tape and Reel", Manufacturer="On Semiconductor", Package Type=SOT-23-3, Channel Polarity="N Channel", ComponentLink1Description="Manufacturer URL", ComponentLink1URL=http://www.onsemi.com/, ComponentLink2Description=Datasheet, ComponentLink2URL=http://www.onsemi.com/pub_link/Collateral/2N7002L-D.PDF, ComponentLink3Description="Package Specification", ComponentLink3URL=http://www.onsemi.cn/pub_link/Collateral/318-08.PDF, Configuration=Single, DatasheetVersion="Rev. 7", ID Max (A)=0.115, Mounting Technology="Surface Mount", PackageDescription="3-Pin Small Outline Transistor, Body 2.92 x 1.3 mm, Pitch 0.95 mm", PackageReference=SOT-23-3-318-08, PackageVersion="Rev. AP, 11/2009", Packing="Tape and Reel", PartNumber=2N7002LT1G, RoHS=Pb-Free, V(BR)DSS Min (V)=60, VGS Max (V)=20, VGS(th) Max (V)=2.5
Q2: library part CMP-12801-000062-2, "MOSFET P-CH 30V SOT23", Case/Package=SOT-23, Continuous Drain Current (ID)=3.8A, Drain to Source Resistance=65mR, Drain to Source Voltage (Vdss)=-30V, Gate to Source Voltage (Vgs)=20V, Input Capacitance=563pF, Max Operating Temperature=150°C, Max Power Dissipation=1.08W, Min Operating Temperature=-55°C, Package Quantity=3000, Threshold Voltage=-2.1V, Contact Plating=Tin, Element Configuration=Single, Fall Time=15ns, Height=1.1mm, Lead Free="Lead Free", Length=3mm, Mount="Surface Mount", Number of Channels=1, Number of Pins=3, Packaging="Tape and Reel", Radiation Hardening=No, Rds On Max=65mR, REACH SVHC="No SVHC", Rise Time=5ns, Turn-Off Delay Time=31ns, Turn-On Delay Time=4.8ns, Weight=0.000282oz, Width=1.4mm
Q3: library part CMP-00030-46521050-1, "TSOP34836 TSOP348 Series 2.5 to 5.5 V 36 KHz 350 uA 45 m Side View IR Receiver", Case/Package=Module, Frequency=36kHz, Max Operating Temperature=85°C, Max Power Dissipation=10mW, Max Supply Voltage=5.5V, Min Operating Temperature=-25°C, Min Output Voltage=100mV, Min Supply Voltage=2.5V, Nominal Supply Current=450µA, Operating Supply Current=350µA, Output Current=5mA, Contact Plating=Tin, Height=6.95mm, Lead Free="Lead Free", Lead Length=23.6mm, Length=6mm, Mount="Through Hole", NexarPartId=46521050, Number of Pins=3, Orientation="Side View", Radiation Hardening=No, REACH SVHC=Unknown, RoHS=Compliant, Schedule B=8541409500, Sensing Distance=45m, Viewing Angle=45°, Wavelength=950nm, Width=5.6mm
R1 R2 R3 R10 R13 R14 R15 R16 R17 R18: library part CMP-03211-002989-1, "CRGCQ 0805 10K 5%", Ambient Temperature Range High=+70°C, Manufacturer="TE Connectivity", Manufacturer Part Number=CRGCQ0805J10K, Package=CRGCQ0805, Power Rating=0.125W, Resistance=10KΩ, Temperature="-55°C to +155°C", Temperature Coefficient=±100ppm/°C, Temperature Range High=+155°C, Temperature Range Low=-55°C, Tolerance=0.05, Voltage Rating=150V, Automotive=Yes, Automotive Grade="Grade 914", Category=Res, ComponentLink2Description=Datasheet, ComponentLink2URL=https://www.te.com/commerce/DocumentDelivery/DDEController?Action=showdoc&DocId=Data+Sheet%7F1773204-3%7F1%7Fpdf%7FEnglish%7FENG_DS_1773204-3_1.pdf%7F4-2176341-923, Composition="Thick Film", Device Class L1="Passive Components", Device Class L2=Resistors, Device Class L3="Chip SMD Resistors", Digikey Description="CRGCQ 0805 10K 5%", Height=0.65mm, Ipc Land Pattern Name=RESC200125X55, Lead Free=Yes, Mouser Description="Res Thick Film 0805 10K Ohm 5% 0.125W(1/8W) ±100ppm/C Pad SMD Automotive T/R", Octopart=https://octopart.com/crgcq0805j10k-te+connectivity-91018201, RoHS=TRUE, Series=CRGCQ
R4 R5 R6: library part CMP-2001-04488-2, "RES SMD 220 OHM 1% 1/8W 0805", Manufacturer=Yageo, Manufacturer Part Number=AC0805FR-07220RL, Package=AC0805, Power Rating=1/8W, Resistance=220Ω, Temperature="-55°C to +155°C", Temperature Range High=+155°C, Temperature Range Low=-55°C, Tolerance=0.01, Voltage Rating=150V, Automotive=Yes, Automotive Grade="Grade 0", Category=Res, ComponentLink2Description=Datasheet, ComponentLink2URL=http://www.yageo.com/documents/recent/PYu-AC_51_RoHS_L_6.pdf, Composition="Thick Film", Device Class L1="Passive Components", Device Class L2=Resistors, Device Class L3="Chip SMD Resistors", Digikey Description="RES SMD 220 OHM 1% 1/8W 0805", Footprint Url=http://www.yageo.com/exep/pages/download/literatures/PYu-R_Mount_10.pdf, Height=0.6mm, Ipc Land Pattern Name=RESC200125X50, Lead Free=Yes, Mouser Description="Thick Film Resistors - SMD 1/8W 220ohm 1% AEC-Q200", Octopart=https://octopart.com/ac0805fr-07220rl-yageo-26041145, RoHS=TRUE, Series=AC
R7: library part CMP-02407-002130-1, "RES Thick Film, 100Ω, 5%, 0.5W, 200ppm/°C, 0805", Case Code (Imperial)=0805, Case Code (Metric)=2012, Max Operating Temperature=155°C, Max Power Dissipation=333mW, Min Operating Temperature=-55°C, Package Quantity=1, Power Rating=330mW, Temperature Coefficient=200ppm/°C, Tolerance=5%, Voltage Rating=150V, Case/Package=0805, Composition="Thick Film", Contact Plating=Tin, Features="Automotive AEC-Q200", Height=0.024inch, Lead Free="Lead Free", Length=0.079inch, Number of Terminations=2, Packaging="Tape and Reel", Radiation Hardening=No, Resistance=100R, Termination=SMD/SMT, Weight=0.000194oz, Width=0.049inch
R8: library part CMP-2001-03651-2, "RES Thick Film, 1Ω, 5%, 0.125W, 200ppm/°C, 0805", Case Code (Imperial)=0805, Case Code (Metric)=2012, Max Operating Temperature=155°C, Max Power Dissipation=125mW, Min Operating Temperature=-55°C, Package Quantity=1, Temperature Coefficient=200ppm/°C, Tolerance=5%, Voltage Rating=150V, Case/Package=0805, Composition="Thick Film", Contact Plating=Tin, Depth=1.25mm, Features="Automotive AEC-Q200", Height=0.02inch, Lead Free="Lead Free", Length=2mm, Military Standard=Not, Number of Pins=2, Number of Terminations=2, Packaging="Tape and Reel", Power Rating=125mW, Radiation Hardening=No, Resistance=1R, Termination=SMD/SMT, Voltage Rating (DC)=150V, Weight=0.000194oz, Width=1.25mm
R9: library part CMP-02407-001315-1, "RES 1.05K OHM 0.5% 1/5W 0805", Case Code (Imperial)=0805, Case Code (Metric)=2012, Max Operating Temperature=125°C, Max Power Dissipation=200mW, Min Operating Temperature=-55°C, Package Quantity=1, Power Rating=125mW, Resistance=100kR, Temperature Coefficient=50ppm/°C, Tolerance=1%, Voltage Rating=150V, Case/Package=0805, Composition="Thin Film", Contact Plating=Tin, Depth=1.25mm, Height=0.024inch, Lead Free="Lead Free", Length=2mm, Military Standard=Not, Number of Terminations=2, Packaging="Tape and Reel", Radiation Hardening=No, Weight=0.000162oz, Width=1.2mm
R11 R12: library part CMP-26527-000104-1, "RES 0 OHM JUMPER 1/2W 0805", Case Code (Imperial)=0805, Case Code (Metric)=2012, Max Operating Temperature=155°C, Min Operating Temperature=-55°C, Package Quantity=1, Resistance=0mR, Case/Package=0805, Height=0.026inch, Lead Free="Lead Free", Length=0.079inch, Mount="Surface Mount", Number of Terminations=2, Packaging="Tape and Reel", Radiation Hardening=No, RoHS Compliant=Yes, Termination=Wraparound, Width=0.049inch
SW1: library part CMP-47022-000005-1, "SWITCH SLIDE SPDT 4A 125V", Contact Resistance=10mR, Current Rating=1A, Max Operating Temperature=85°C, Max Voltage Rating (AC)=250V, Max Voltage Rating (DC)=30V, Min Operating Temperature=-40°C, Package Quantity=100, Voltage Rating (AC)=125V, Actuator Length=6mm, Actuator Material=Nylon, Actuator Type=Standard, Contact Material=Silver, Electrical Life=10000Cycles, Mechanical Life=20000Cycles, Mount="Through Hole", Orientation=Straight, Packaging=Bulk, Series=25000N, Switch Function=On-On, Switch Travel=4mm, Termination="PC Pin", Throw Configuration=SPDT, Voltage Rating (DC)=30V
SW2 SW3: library part CMP-03407-000016-1, "SWITCH TACTILE SPST-NO 0.02A 15V", Case/Package=SMD/SMT, Contact Current Rating=20mA, Contact Resistance=100mR, Max Operating Temperature=85°C, Max Voltage Rating (DC)=15V, Min Operating Temperature=-35°C, Operating Force=1.57N, Package Quantity=4000, Actuator Length=0.4mm, Actuator Material=Brass, Actuator Type=Standard, Contact Material="Copper Alloy", Contact Plating=Silver, Electrical Life=500000Cycles, ELV=Compliant, Illumination Type=Non-Illuminated, Max Current Rating=20mA, Mechanical Life=500000Cycles, Mount="Surface Mount", Orientation=Straight, Packaging="Tape and Reel", Radiation Hardening=No, RoHS Compliant=Yes, Series=FSMCT, Switch Function=Off-Mom, Switch Travel=0.25mm, Termination="Gull Wing", Throw Configuration=SPST, Type=Switch, Voltage Rating (DC)=15V
U1: library part CMP-0237-00215-3, "ARM Cortex-M3 32-bit MCU, 64 KB Flash, 20 KB Internal RAM, 37 I/Os, 48-pin LQFP, -40 to 85 degC, Tray", I/Os (High Current)=37, Operating Frequency(F) (Processor speed) (MHz)=72, Supply Voltage(Vcc) min (V)=2, A/D Converter="2x12-bit (10 Channel)", ComponentLink1Description="Manufacturer URL", ComponentLink1URL=http://www.st.com/web/en/home.html, ComponentLink2Description=Datasheet, ComponentLink2URL=http://www.st.com/st-web-ui/static/active/en/resource/technical/document/datasheet/CD00161566.pdf, ComponentLink3Description="Package Specification", ComponentLink3URL=http://www.st.com/st-web-ui/static/active/en/resource/technical/document/datasheet/DM00058181.pdf, Core="ARM Cortex-M3", DatasheetVersion="Rev. 16", FLASH Size (Prog) (kB)=64, Internal RAM Size (kB)=20, Mounting Technology="Surface Mount", PackageDescription="48-Pin Low Profile Quad Flat Package, 7 x 7 mm Body, 0.5 mm Pitch", PackageReference=LQFP48, PackageVersion="Rev. 6, 06/2013", Packing=Tray, PartNumber=STM32F103C8T6
U2: library part CMP-0069-00269-3, "SIMPLE SWITCHER® Power Converter 150 KHz 3A Step-Down Voltage Regulator, 5-pin TO-263, Pb-Free", Manufacturer="Texas Instruments", PackageTopMarking="NSUZXYTTE#*LM2596S*-5.0 P+", PowerWise=N, Code_JEDEC=MO-169-AB, ComponentLink1Description="Datasheet URL", ComponentLink1URL=http://www.ti.com/general/docs/lit/getliterature.tsp?genericPartNumber=LM2596&fileType=pdf, CompType=Switcher, PackageDescription="TO-263, Molded, .400 x .390 x .180in, 5 Lead, .067in Pitch, Surface Mount", PackageReference=KTT0005B, PinCount=5, RoHS=Y
U3: library part CMP-209535-000001-1, "LDO Voltage Regulators 1A, 3.3V", Dropout Voltage=1.1V, Manufacturer="Advanced Monolithic Systems", Max Junction Temp=+125°C, Max Power Dissipation=1.2W, Max Supply Voltage=15V, Nominal Supply Current=5mA, Output Current=1A, Output Voltage=3.3V, Package=AMS1117, Temperature="-40°C to +125°C", Temperature Range Low=-40°C, Automotive=No, Category=IC, ComponentLink2Description=Datasheet, ComponentLink2URL=http://www.advanced-monolithic.com/pdf/ds1117.pdf, Device Class L1="Integrated Circuits (ICs)", Device Class L2="Power Management ICs", Device Class L3="Voltage Regulators - Linear", Height=1.8mm, Ipc Land Pattern Name=SOT229P700X180-4, Lead Free=Yes, Manufacturer Part Number=AMS1117-3.3, Number Of Outputs=1, Octopart=https://octopart.com/ams1117-3.3-advanced+monolithic+systems-25899300, Output Type=Fixed, RoHS=TRUE, Standoff Height=0.64mm, Temperature Range High=+125°C
U4: library part CMP-1773-00001-1, "Driver IC for Dual DC Motor, 15 V, -20 to 85 degC, 24-Pin SSOP, RoHS, Tape and Reel", Case\Package=TO-236-3, Forward Current="70 mA", Forward Voltage="1 V", Max Operating Temperature="125 degC", Max Power Dissipation="200 mW", Max Surge Current="100 mA", Min Operating Temperature="-55 degC", Package Quantity=3000, Peak Reverse Current="0.1 uA", ComponentLink1Description="Manufacturer URL", ComponentLink1URL=http://www.toshiba.com/, ComponentLink2Description=Datasheet, ComponentLink2URL=https://toshiba.semicon-storage.com/info/docget.jsp?did=10660&prodName=TB6612FNG, DatasheetVersion=Oct-14, Element Configuration="Common Cathode", Elements=2, Height="1.1 mm", Length="3 mm", Mount="Surface Mount", PackageDescription="24-Pin Shrink Small Outline Package Integrated Circuit, Body 7.8 x 5.6 mm, Pitch 0.65 mm", PackageReference=SSOP-24, Packaging="Tape and Reel", Pins=3, Radiation Hardening=No, REACH SVHC="No SVHC", Recovery Time="5 ns", RoHSCompliant=true, Width="1.4 mm"
X1: library part CMP-0585-00002-2, "ATS-SM Series Quartz Crystal, 16 MHz, -20 to 70 degC, 11.1 x 4.83 x 4.3mm SMD, RoHS, Tape and Reel", Frequency="16 MHz", Manufacturer="CTS Corporation", Operating Temperature="-20 to 70 degC", PartNumber=ATS16ASM-1, Shunt Capacitance (C0)="7.0 pF Max", ComponentLink1Description="Manufacturer URL", ComponentLink1URL=http://www.ctscorp.com/, ComponentLink2Description=Datasheet, ComponentLink2URL=http://www.ctscorp.com/components/Datasheets/008-0309-0.pdf, ComponentLink3Description="Package Specification", ComponentLink3URL=http://www.ctscorp.com/components/Datasheets/008-0309-0.pdf, Crystal Cut=AT-Cut, DatasheetVersion="Rev. K", Drive Level (Type)="100 uW", ESR Maximum="40 Ohms", Mounting Technology="Surface Mount", Oscillation Mode="Fundamental or 3rd Overtone", PackageDescription="2-Pin SMD, Body 11.1 x 4.83 mm, Pitch 8.5 mm", PackageReference=ATS-SM-XTAL-2, Packing="Tape and Reel", RoHS=TRUE
Y1: library part CMP-200220-000019-1, "CRYSTAL 32.7680KHZ 12.5PF SMD", Case/Package=SMD/SMT, ESR (Equivalent Series Resistance)=80kR, Frequency=32.768kHz, Frequency Tolerance=20ppm, Load Capacitance=12.5pF, Max Operating Temperature=85°C, Min Operating Temperature=-40°C, Height=0.024inch, Length=0.081inch, Mount="Surface Mount", Packaging="Cut Tape", RoHS Compliant=Yes, Series=NX2012SA, Width=0.047inch

## Via types
v1: diameter 0.6, hole 0.3, Top Layer to Bottom Layer, 64 vias
v2: diameter 5.2, hole 3.2, Top Layer to Bottom Layer, 19 vias
v3: diameter 1.27, hole 0.711, Top Layer to Bottom Layer, 6 vias
v4: diameter 42/42 (per signal layer), hole 40, Top Layer to Bottom Layer, 1 vias